# EAGLE board Fantastic Bigery-Inari (EAGLE 9.7.0)

Size 201.75 x 129.08 mm. Coordinates in mm from the lower left corner, seen from the top.
Outline: 0,0 201.75,0 201.75,129.08 0,129.08 0,0
Copper layers (1*16): Top 0.035mm / dielectric 1.5mm / Bottom 0.035mm
Design rules "default": minimum track width 6mil, minimum drill 0.35mm, track to track 6mil, track to pad 6mil, pad to pad 6mil, via to via 6mil, smd to smd 6mil, copper to edge 40mil, drill to drill 6mil, minimum pad ring 10mil, minimum via ring 8mil, stop-mask expansion 4mil, vias tented up to drill 0mil, thermal gap 10mil

## Footprints (pad centres in the part's own frame; a part is rotated, then mirrored left to right if it is on the bottom)
BATTERY-GENERIC = drill 1.118 pad 3.15 octagon: + 2.54,0; - -2.54,0
LEDRD254W60D565H860B_G = drill 0.981 pad 1.581: 1 -1.27,0; 2 1.27,0
LEDRD254W60D565H860B = drill 0.981 pad 1.581: 1 -1.27,0; 2 1.27,0
1X08 = drill 1.016 long: 1 -8.89,0; 2 -6.35,0; 3 -3.81,0; 4 -1.27,0; 5 1.27,0; 6 3.81,0; 7 6.35,0; 8 8.89,0
MOTOR = drill 1.118 pad 3.15 octagon: + 2.54,0; - -2.54,0
RESAD1016W63L850D250B = drill 0.83 pad 1.43: 1 -5.08,0; 2 5.08,0
SWITCH-MOMENTARY-PTH-6.5MM = drill 1.016 pad 1.88: 1 -3.251,2.261; 2 3.251,2.261; 3 -3.251,-2.261; 4 3.251,-2.261
LCD-I2C = drill 1.016 long: 1 -19.05,-5.08; 2 -19.05,-7.62; 3 -19.05,-10.16; 4 -19.05,-12.7
DIP762W53P254L1969H508Q16B = drill 0.743 pad 1.343: 1 -3.81,8.89; 2 -3.81,6.35; 3 -3.81,3.81; 4 -3.81,1.27; 5 -3.81,-1.27; 6 -3.81,-3.81; 7 -3.81,-6.35; 8 -3.81,-8.89; 9 3.81,-8.89; 10 3.81,-6.35; 11 3.81,-3.81; 12 3.81,-1.27; 13 3.81,1.27; 14 3.81,3.81; 15 3.81,6.35; 16 3.81,8.89
ARDUINO-UNO-R3-SHIELD = drill 1.016 pad 1.88: 3.3V 24.13,-2.54; 5V 24.13,0; A0 24.13,12.7; A1 24.13,15.24; A2 24.13,17.78; A3 24.13,20.32; A4 24.13,22.86; A5 24.13,25.4; AREF -24.13,-13.97; D2 -24.13,20.32; D3 -24.13,17.78; D4 -24.13,15.24; D5 -24.13,12.7; D6 -24.13,10.16; D7 -24.13,7.62; D8 -24.13,3.81; D9 -24.13,1.27; D10 -24.13,-1.27; D11 -24.13,-3.81; D12 -24.13,-6.35; D13 -24.13,-8.89; GND@0 24.13,2.54; GND@1 24.13,5.08; GND@2 -24.13,-11.43; IOREF 24.13,-7.62; NC 24.13,-10.16; RES 24.13,-5.08; RX -24.13,25.4; SCL -24.13,-19.05; SDA -24.13,-16.51; TX -24.13,22.86; VIN 24.13,7.62

## Placement (x,y rotation side)
BAT1  9V  [BATTERY-GENERIC]  8.3,8.26 90 top
D1  GREEN  [LEDRD254W60D565H860B_G]  81.59,111.88 180 top
D2  RED  [LEDRD254W60D565H860B]  55.35,110.88 180 top
KEYPAD1  KEYPAD-4X4  [1X08]  99.31,122.8 0 top
M1  MOTOR_HDR  [MOTOR]  8.26,25.24 0 top
R2  10k  [RESAD1016W63L850D250B]  67.78,104.86 90 top
S1  SWITCH_MOMENTARY  [SWITCH-MOMENTARY-PTH-6.5MM]  69.83,119.63 90 top
U1  LCD-16X2-I2CSUNFOUNDER-IIC  [LCD-I2C]  146.13,42.86 0 top
U2  L293E  [DIP762W53P254L1969H508Q16B]  74.54,32.42 90 top
U3  ARDUINO-UNO-R3-SHIELD  [ARDUINO-UNO-R3-SHIELD]  88.44,68.45 270 top

## Library data of the parts
BAT1 KEYPAD1 M1 R2 S1 U1-U3 = Tinkercad
D1 = Tinkercad; CATEGORY: Opto-Electronic; SUB-CATEGORY: LED; VALUE: LED_GREEN
D2 = Tinkercad; CATEGORY: Opto-Electronic; SUB-CATEGORY: LED; VALUE: LED_RED

## Nets
BAT1+: BAT1.+ U2.8
BAT1-: BAT1.- D1.2 D2.2 S1.3 U1.1 U2.4 U2.5 U2.12 U2.13 U3.GND@0 U3.GND@1 U3.GND@2
M1_+: M1.+ U2.3
M1_-: M1.- U2.6
S1_1: R2.2 S1.1
U3_5V: U1.2 U2.16 U3.5V
U3_A0: U2.7 U3.A0
U3_A1: U2.1 U3.A1
U3_A4: U1.3 U3.A4
U3_A5: U1.4 U3.A5
U3_D2: KEYPAD1.8 U3.D2
U3_D3: KEYPAD1.7 U3.D3
U3_D4: KEYPAD1.6 U3.D4
U3_D5: KEYPAD1.5 U3.D5
U3_D6: KEYPAD1.4 U3.D6
U3_D7: KEYPAD1.3 U3.D7
U3_D8: KEYPAD1.2 U3.D8
U3_D9: KEYPAD1.1 U3.D9
U3_D10: D1.1 U3.D10
U3_D11: D2.1 U3.D11
U3_D12: R2.1 U3.D12
U3_D13: U2.2 U3.D13

## Tracks (layer width: path | path; a pad name or v marks a point on that pad's centre or on a via)
BAT1+  (1 unrouted)
BAT1-  (11 unrouted)
M1_+  (1 unrouted)
M1_-  (1 unrouted)
S1_1  (1 unrouted)
U3_5V  (2 unrouted)
U3_A0  (1 unrouted)
U3_A1  (1 unrouted)
U3_A4  (1 unrouted)
U3_A5  (1 unrouted)
U3_D2  (1 unrouted)
U3_D3  (1 unrouted)
U3_D4  (1 unrouted)
U3_D5  (1 unrouted)
U3_D6  (1 unrouted)
U3_D7  (1 unrouted)
U3_D8  (1 unrouted)
U3_D9  (1 unrouted)
U3_D10  (1 unrouted)
U3_D11  (1 unrouted)
U3_D12  (1 unrouted)
U3_D13  (1 unrouted)